# Altium PCB Atmega2560.PcbDoc
Units mm, origin at the board's own origin, x right, y up, seen from the top; angles counter-clockwise.
Board outline 123.1 x 125.77 mm, 2 copper layers (Top Layer, Bottom Layer); 16 components, 92 nets, 362 pads, 0 vias.
Unrouted connection lines stored in the file: 125.
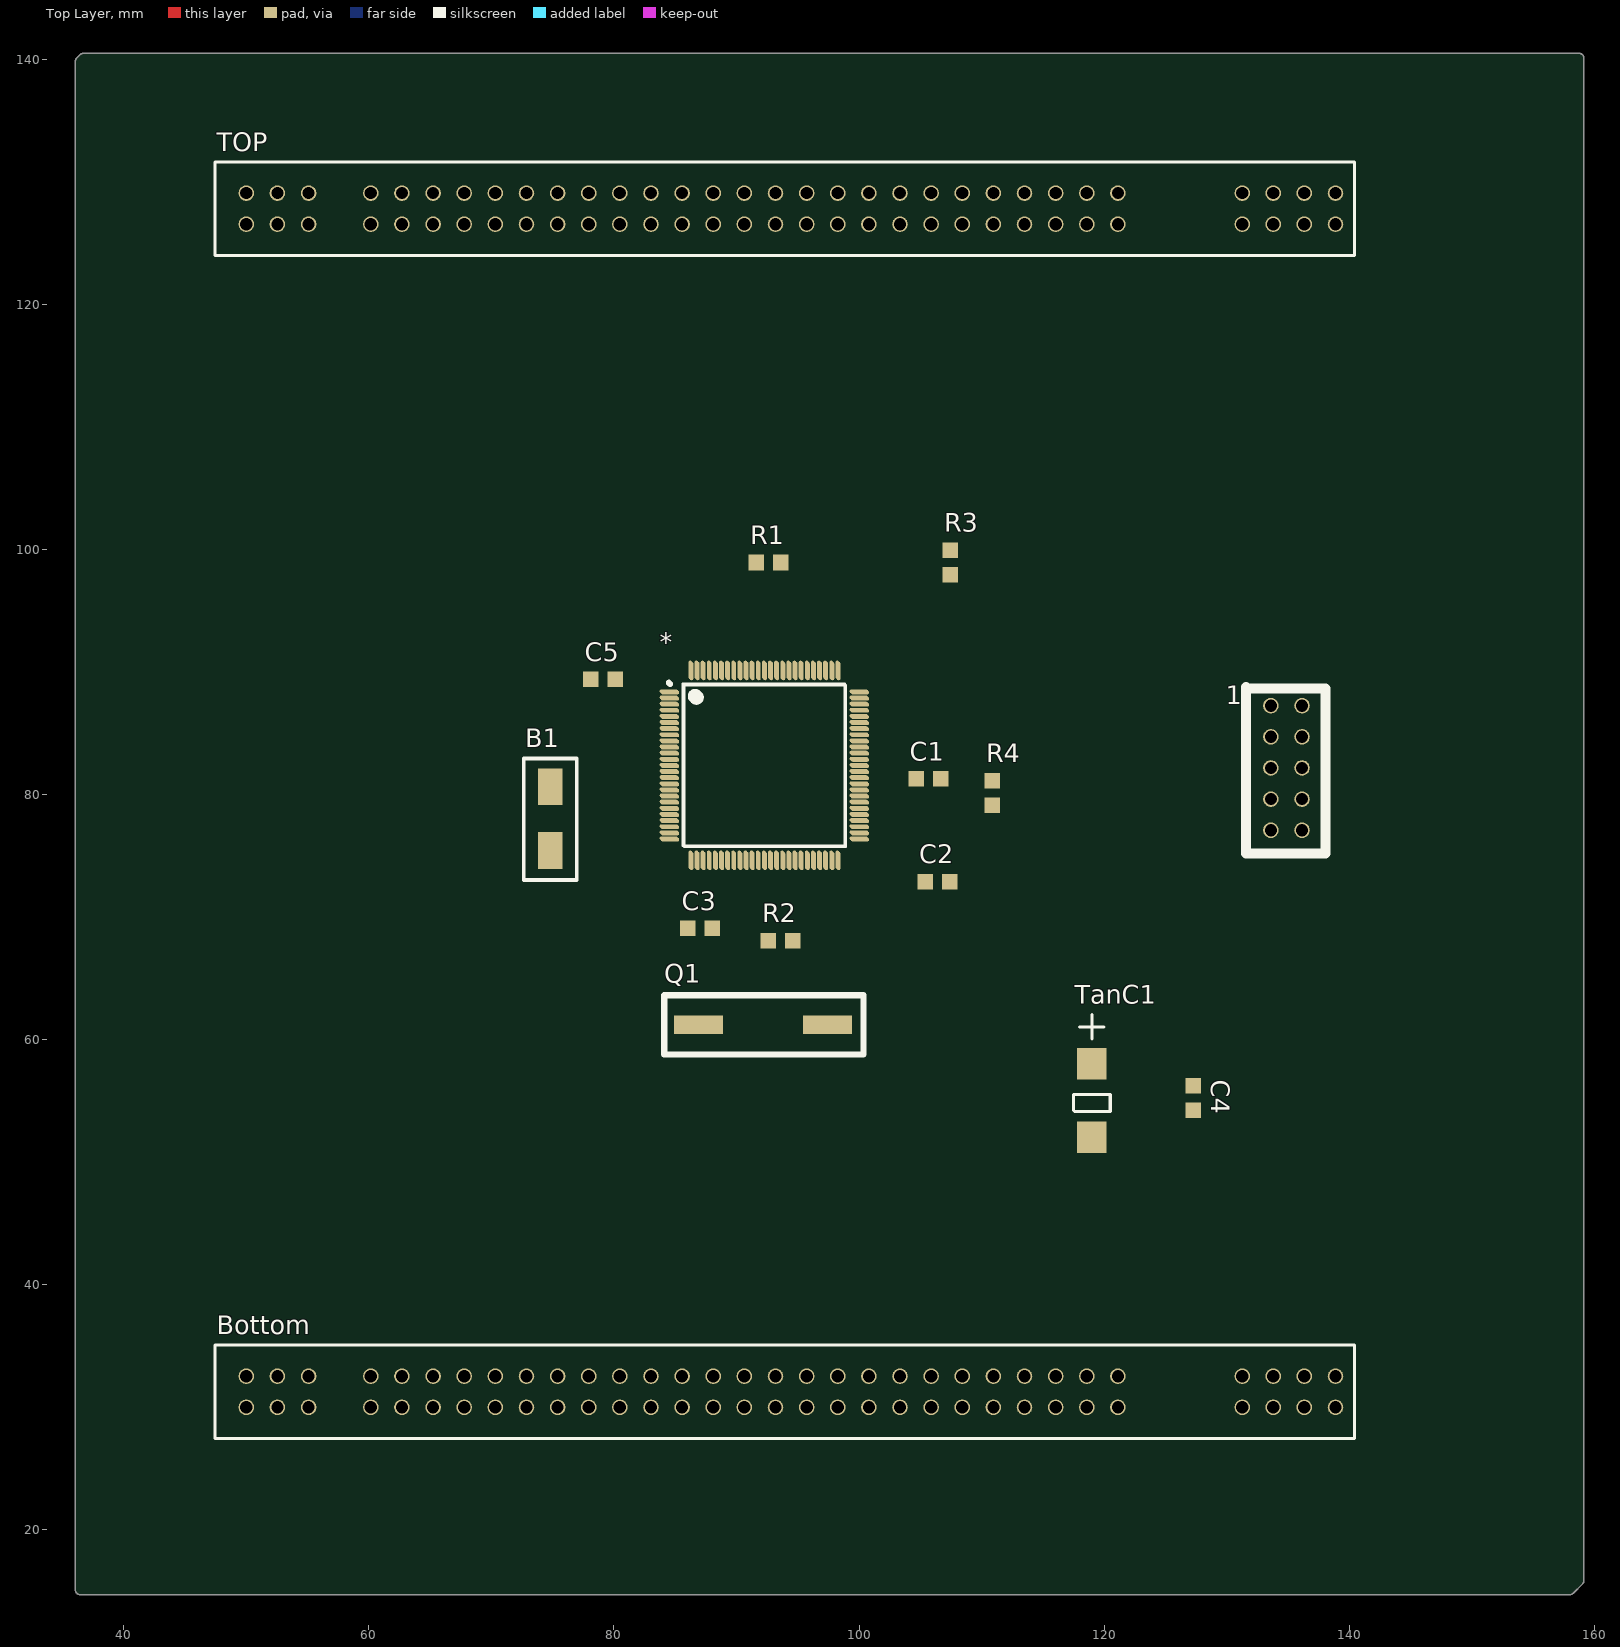
[diagram p0: Top Layer view]
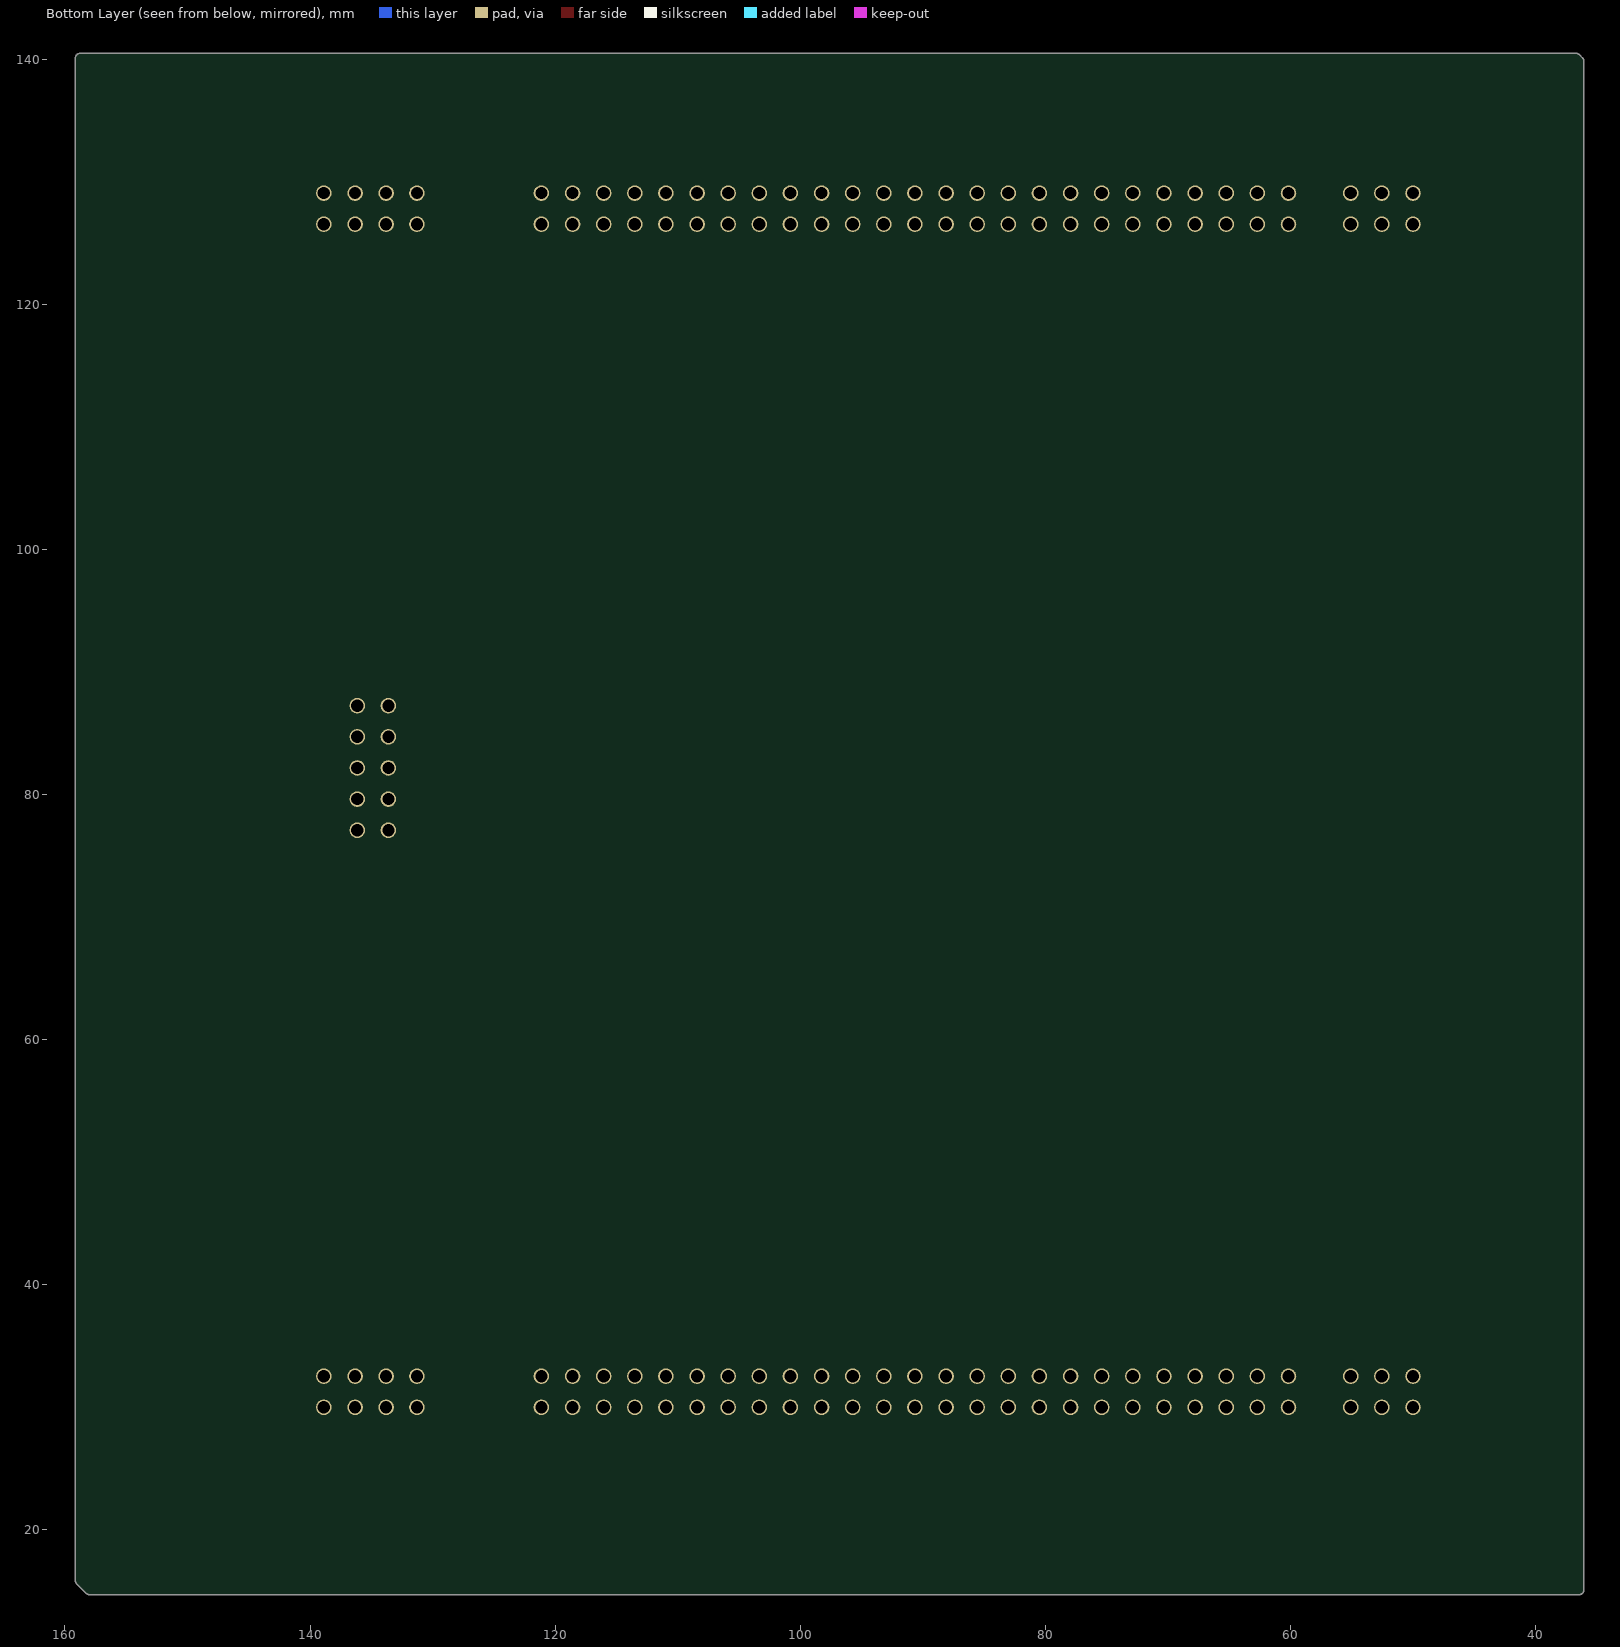
[diagram p1: Bottom Layer view, seen from below]

## Layer stack, top to bottom
Top Solder: solder mask 0.0102, Solder Resist, Dk 3.5
Top Layer: signal copper 0.0356
Dielectric 1: dielectric 0.32, FR-4, Dk 4.8
Bottom Layer: signal copper 0.0356
Bottom Solder: solder mask 0.0102, Solder Resist, Dk 3.5

## Board outline
36.049,15.113 36.049,139.827 cw(c36.449,139.827) 36.166,140.111 36.166,140.11 36.42,140.364 36.419,140.364 cw(c36.703,140.081) 36.703,140.481 158.75,140.481 cw(c158.75,140.081) 159.15,140.081 159.15,15.875 cw(c158.75,15.875) 159.033,15.591 159.033,15.592 158.271,14.83 158.272,14.83 cw(c157.988,15.113) 157.988,14.713 36.449,14.713 cw(c36.449,15.113)

## Design rules (kind name [scope] priority, off if disabled: settings)
Clearance [All] p1: gap=0.254
PolygonConnect [All] p1: connectstyle=Relief reliefconductorwidth=0.254 reliefentries=4 polygonreliefangle="90 Angle" airgapwidth=0.254
RoutingVias [All] p1: holewidth=0.711 width=1.27 viastyle="Through Hole" minholewidth=0.711 minwidth=1.27 maxholewidth=0.711 maxwidth=1.27
SolderMaskExpansion [All] p1: expansion=0.102
Width [All] p1: maxlimit=0.254 minlimit=0.254 preferedwidth=0.254
30 further rules are at their usual default settings.

## Components (designator, comment, footprint, x,y, rotation, side; value= is the part's Value field where it differs from the comment)
1 "JTAG" JTAG 136.144,77.089 r90 top
* "Atmega 2560" "ATMEGA 2560" 108.701,95.38 r0 top
B1 "DTSM 32" "DTSM 32" 74.803,75.445 r90 top
Bottom "CONNECTOR_BOTTOM" Connector 50,30 r0 top
C1 "CAPACITY" R0805 104.648,81.28 r0 top
C2 "CAPACITY" R0805 105.41,72.898 r0 top
C3 "CAPACITY" R0805 86.011,69.088 r0 top
C4 "CAPACITY" R0805 127.254,56.229 r270 top
C5 "CAPACITY" R0805 78.105,89.408 r0 top
Q1 "hc-49 sm" hc-49sm 84.741,63.624 r0 top
R1 "R0805" R0805 91.599,98.933 r0 top
R2 "R0805" R0805 94.583,68.072 r180 top
R3 "R0805" R0805 107.442,99.949 r270 top
R4 "R0805" R0805 110.871,79.121 r90 top
TanC1 "0.1 мкФ" "tantal cap" 118.999,52.039 r0 top
TOP "CONNECTOR_TOP" Connector 50,126.54 r0 top

## Footprints (in the part's own frame and the unit in brackets; to place one, negate y for a bottom-side part, rotate by r counter-clockwise, add the part's x,y. Pads: shape width x height; smd on the part's side, far side on the other; paste and mask are expansions set on the pad)
"ATMEGA 2560" [mm]
  oval 1.5x0.3 smd: 1(-24.225,-6.954) 1(-24.125,-7.054) 2(-24.225,-7.454) 2(-24.125,-7.554) 3(-24.225,-7.954) 3(-24.125,-8.054) 4(-24.225,-8.454) 4(-24.125,-8.554) 5(-24.225,-8.954) 5(-24.125,-9.054) 6(-24.225,-9.454) 6(-24.125,-9.554) 7(-24.225,-9.954) 7(-24.125,-10.054) 8(-24.225,-10.454) 8(-24.125,-10.554) 9(-24.225,-10.954) 9(-24.125,-11.054) 10(-24.225,-11.454) 10(-24.125,-11.554) 11(-24.225,-11.954) 11(-24.125,-12.054) 12(-24.225,-12.454) 12(-24.125,-12.554) 13(-24.225,-12.954) 13(-24.125,-13.054) 14(-24.225,-13.454) 14(-24.125,-13.554) 15(-24.225,-13.954) 15(-24.125,-14.054) 16(-24.225,-14.454) 16(-24.125,-14.554) 17(-24.225,-14.954) 17(-24.125,-15.054) 18(-24.225,-15.454) 18(-24.125,-15.554) 19(-24.225,-15.954) 19(-24.125,-16.054) 20(-24.225,-16.454) 20(-24.125,-16.554) 21(-24.225,-16.954) 21(-24.125,-17.054) 22(-24.225,-17.454) 22(-24.125,-17.554) 23(-24.225,-17.954) 23(-24.125,-18.054) 24(-24.225,-18.454) 24(-24.125,-18.554) 25(-24.225,-18.954) 25(-24.125,-19.054) 51(-8.725,-18.954) 51(-8.625,-19.054) 52(-8.725,-18.454) 52(-8.625,-18.554) 53(-8.725,-17.954) 53(-8.625,-18.054) 54(-8.725,-17.454) 54(-8.625,-17.554) 55(-8.725,-16.954) 55(-8.625,-17.054) 56(-8.725,-16.454) 56(-8.625,-16.554) 57(-8.725,-15.954) 57(-8.625,-16.054) 58(-8.725,-15.454) 58(-8.625,-15.554) 59(-8.725,-14.954) 59(-8.625,-15.054) 60(-8.725,-14.454) 60(-8.625,-14.554) 61(-8.725,-13.954) 61(-8.625,-14.054) 62(-8.725,-13.454) 62(-8.625,-13.554) 63(-8.725,-12.954) 63(-8.625,-13.054) 64(-8.725,-12.454) 64(-8.625,-12.554) 65(-8.725,-11.954) 65(-8.625,-12.054) 66(-8.725,-11.454) 66(-8.625,-11.554) 67(-8.725,-10.954) 67(-8.625,-11.054) 68(-8.725,-10.454) 68(-8.625,-10.554) 69(-8.725,-9.954) 69(-8.625,-10.054) 70(-8.725,-9.454) 70(-8.625,-9.554) 71(-8.725,-8.954) 71(-8.625,-9.054) 72(-8.725,-8.454) 72(-8.625,-8.554) 73(-8.725,-7.954) 73(-8.625,-8.054) 74(-8.725,-7.454) 74(-8.625,-7.554) 75(-8.725,-6.954) 75(-8.625,-7.054)
  oval 0.3x1.5 smd: 26(-22.475,-20.704) 26(-22.375,-20.804) 27(-21.975,-20.704) 27(-21.875,-20.804) 28(-21.475,-20.704) 28(-21.375,-20.804) 29(-20.975,-20.704) 29(-20.875,-20.804) 30(-20.475,-20.704) 30(-20.375,-20.804) 31(-19.975,-20.704) 31(-19.875,-20.804) 32(-19.475,-20.704) 32(-19.375,-20.804) 33(-18.975,-20.704) 33(-18.875,-20.804) 34(-18.475,-20.704) 34(-18.375,-20.804) 35(-17.975,-20.704) 35(-17.875,-20.804) 36(-17.475,-20.704) 36(-17.375,-20.804) 37(-16.975,-20.704) 37(-16.875,-20.804) 38(-16.475,-20.704) 38(-16.375,-20.804) 39(-15.975,-20.704) 39(-15.875,-20.804) 40(-15.475,-20.704) 40(-15.375,-20.804) 41(-14.975,-20.704) 41(-14.875,-20.804) 42(-14.475,-20.704) 42(-14.375,-20.804) 43(-13.975,-20.704) 43(-13.875,-20.804) 44(-13.475,-20.704) 44(-13.375,-20.804) 45(-12.975,-20.704) 45(-12.875,-20.804) 46(-12.475,-20.704) 46(-12.375,-20.804) 47(-11.975,-20.704) 47(-11.875,-20.804) 48(-11.475,-20.704) 48(-11.375,-20.804) 49(-10.975,-20.704) 49(-10.875,-20.804) 50(-10.475,-20.704) 50(-10.375,-20.804) 76(-10.475,-5.204) 76(-10.375,-5.304) 77(-10.975,-5.204) 77(-10.875,-5.304) 78(-11.475,-5.204) 78(-11.375,-5.304) 79(-11.975,-5.204) 79(-11.875,-5.304) 80(-12.475,-5.204) 80(-12.375,-5.304) 81(-12.975,-5.204) 81(-12.875,-5.304) 82(-13.475,-5.204) 82(-13.375,-5.304) 83(-13.975,-5.204) 83(-13.875,-5.304) 84(-14.475,-5.204) 84(-14.375,-5.304) 85(-14.975,-5.204) 85(-14.875,-5.304) 86(-15.475,-5.204) 86(-15.375,-5.304) 87(-15.975,-5.204) 87(-15.875,-5.304) 88(-16.475,-5.204) 88(-16.375,-5.304) 89(-16.975,-5.204) 89(-16.875,-5.304) 90(-17.475,-5.204) 90(-17.375,-5.304) 91(-17.975,-5.204) 91(-17.875,-5.304) 92(-18.475,-5.204) 92(-18.375,-5.304) 93(-18.975,-5.204) 93(-18.875,-5.304) 94(-19.475,-5.204) 94(-19.375,-5.304) 95(-19.975,-5.204) 95(-19.875,-5.304) 96(-20.475,-5.204) 96(-20.375,-5.304) 97(-20.975,-5.204) 97(-20.875,-5.304) 98(-21.475,-5.204) 98(-21.375,-5.304) 99(-21.975,-5.204) 99(-21.875,-5.304) 100(-22.475,-5.204) 100(-22.375,-5.304)
  silkscreen extent -24.35,-19.65 -9.77,-6.13, body extent -23.47,-20.05 -9.37,-5.95, height 1.2
Connector [mm] "MCU/FPGA board connector"
  round 1.27 / inner round 0.8 / far side round 1.27 hole 1: 0(0,2.54) 1(2.54,2.54) 2(5.08,2.54) 3(10.16,2.54) 4(12.7,2.54) 5(15.24,2.54) 6(17.78,2.54) 7(20.32,2.54) 8(22.86,2.54) 9(25.4,2.54) 10(27.94,2.54) 11(30.48,2.54) 12(33.02,2.54) 13(35.56,2.54) 14(38.1,2.54) 15(40.64,2.54) 16(43.18,2.54) 17(45.72,2.54) 18(48.26,2.54) 19(50.8,2.54) 20(53.34,2.54) 21(55.88,2.54) 22(58.42,2.54) 23(60.96,2.54) 24(63.5,2.54) 25(66.04,2.54) 26(68.58,2.54) 27(71.12,2.54) 28(81.275,2.54) 29(83.795,2.54) 30(86.325,2.54) 31(88.875,2.54) 32(88.875,0) 33(86.325,0) 34(83.795,0) 35(81.275,0) 36(71.12,0) 37(68.58,0) 38(66.04,0) 39(63.5,0) 40(60.96,0) 41(58.42,0) 42(55.88,0) 43(53.34,0) 44(50.8,0) 45(48.26,0) 46(45.72,0) 47(43.18,0) 48(40.64,0) 49(38.1,0) 50(35.56,0) 51(33.02,0) 52(30.48,0) 53(27.94,0) 54(25.4,0) 55(22.86,0) 56(20.32,0) 57(17.78,0) 58(15.24,0) 59(12.7,0) 60(10.16,0) 61(5.08,0) 62(2.54,0) 63(0,0)
  silkscreen extent -2.54,-2.54 90.43,5.08
"DTSM 32" [mm]
  rect 3x2 smd: 1(0,0) 2(5.2,0)
  silkscreen extent -2.41,-2.16 7.49,2.16
hc-49sm [mm]
  rect 4x1.5 smd: 1(2.159,-2.41) 2(12.668,-2.41)
  silkscreen extent -0.64,-4.83 15.62,0
JTAG [mm]
  round 1.27 / inner round 0.8 / far side round 1.27 hole 1: 1(0,0) 2(0,2.54) 3(2.54,0) 4(2.54,2.54) 5(5.08,0) 6(5.08,2.54) 7(7.62,0) 8(7.62,2.54) 9(10.16,0) 10(10.16,2.54)
  silkscreen extent -1.91,-1.91 11.68,4.57
R0805 [mm]
  rect 1.27x1.27 smd: 1(0,0) 2(2,0)
"tantal cap" [mm]
  rect 2.4x2.6 smd mask+0.05: 0(0,0) 1(0,6)
  silkscreen extent -1.5,2.1 1.5,10

## Part data
Bottom TOP: "control board connector"
TanC1: library part "TECAP, 100 мкФ"

## Nets (pads, with @x,y where several pads share a name; then routed paths per layer and width w, separated by ;. In a path a pad name is that pad's centre, name@x,y a point inside that pad or via, vN(x,y) a via of type N, cw(c..) or ccw(c..) an arc to the next point about the centre after c; other vN are vias at no path point)
"ADC 0": *.97 TOP.32
"ADC 1": *.96 TOP.33
"ADC 2": *.95 TOP.34
"ADC 3": *.94 TOP.35
"ADC 4": *.89 Bottom.31
"ADC 5": *.88 Bottom.30
"ADC 6": *.87 Bottom.29
"ADC 7": *.86 Bottom.28
AREF: *.98 *.100 R1.1
"GND PRO": 1.3 1.5 1.9 *.11 *.32 *.62 *.81 *.99 B1.2 C1.1 C2.1 C3.1 C4.2 C5.1 TanC1.0 TOP.0
Net*_33: *.33 Q1.1
Net*_34: *.34 Q1.2
"PA 0": *.78 TOP.45
"PA 1": *.77 TOP.44
"PA 2": *.76 TOP.43
"PA 3": *.75 TOP.42
"PA 4": *.74 TOP.41
"PA 5": *.73 TOP.40
"PA 6": *.72 TOP.39
"PA 7": *.71 TOP.38
"PB 4": *.23 Bottom.3
"PB 5": *.24 Bottom.4
"PB 6": *.25 Bottom.5
"PB 7": *.26 Bottom.6
"PC 0": *.53 Bottom.60
"PC 1": *.54 Bottom.59
"PC 2": *.55 Bottom.58
"PC 3": *.56 Bottom.57
"PC 4": *.57 Bottom.56
"PC 5": *.58 Bottom.55
"PC 6": *.59 Bottom.54
"PC 7": *.60 Bottom.53
"PD 4": *.47 Bottom.22
"PD 5": *.48 Bottom.25
"PD 6": *.49 Bottom.23
"PD 7": *.50 Bottom.24
"PE 0": *.2 TOP.53
"PE 1": *.3 TOP.54
"PE 2": *.4 TOP.55
"PE 3": *.5 TOP.56
"PE 4": *.6 TOP.57
"PE 5": *.7 TOP.58
"PE 6": *.8 TOP.59
"PE 7": *.9 TOP.60
"PF 4": 1.4 *.93
"PF 5": 1.2 *.92
"PF 6": 1.6 *.91
"PF 7": 1.8 *.90
"PG 2": *.70 TOP.37
"PG 3": *.29 Bottom.8
"PG 4": *.28 Bottom.9
"PG 5": *.1 Bottom.38
"PH 0": *.12 Bottom.10
"PH 1": *.13 Bottom.11
"PH 2": *.14 Bottom.12
"PH 3": *.15 Bottom.13
"PH 4": *.16 Bottom.14
"PH 5": *.17 Bottom.15
"PH 6": *.18 Bottom.16
"PH 7": *.27 Bottom.7
"PJ 0": *.63 Bottom.41
"PJ 1": *.64 Bottom.40
"PJ 2": *.65 Bottom.39
"PJ 3": *.66 TOP.22
"PJ 4": *.67 TOP.21
"PJ 5": *.68 TOP.20
"PJ 6": *.69 TOP.19
"PJ 7": *.79 TOP.46
"PK 4": *.85 TOP.50
"PK 5": *.84 TOP.49
"PK 6": *.83 TOP.48
"PK 7": *.82 TOP.47
"PL 0": *.35 Bottom.52
"PL 1": *.36 Bottom.51
"PL 2": *.37 Bottom.50
"PL 3": *.38 Bottom.49
"PL 4": *.39 Bottom.48
"PL 5": *.40 Bottom.47
"PL 6": *.41 Bottom.46
"PL 7": *.42 Bottom.45
R\D\: *.52 Bottom.36
R\E\S\E\T\: 1.10 *.30 B1.1 R4.1
RX: *.45 Bottom.26
SCL: *.43 R3.2 TOP.36
SDA: *.44 R2.1 TOP.27
"SPI 1": *.19 TOP.26
"SPI 2": *.20 TOP.25
"SPI 3": *.21 TOP.24
"SPI 4": *.22 TOP.23
TX: *.46 Bottom.27
"VCC PRO": 1.1 *.10 *.31 *.61 *.80 C1.2 C2.2 C3.2 C4.1 C5.2 R1.2 R2.2 R3.1 R4.2 TanC1.1 TOP.62
W\R\: *.51 Bottom.37
pads on no net: 1.7 Bottom.0 Bottom.1 Bottom.2 Bottom.17 Bottom.18 Bottom.19 Bottom.20 Bottom.21 Bottom.32 Bottom.33 Bottom.34 Bottom.35 Bottom.42 Bottom.43 Bottom.44 Bottom.61 Bottom.62 Bottom.63 TOP.1 TOP.2 TOP.3 TOP.4 TOP.5 TOP.6 TOP.7 TOP.8 TOP.9 TOP.10 TOP.11 TOP.12 TOP.13 TOP.14 TOP.15 TOP.16 TOP.17 TOP.18 TOP.28 TOP.29 TOP.30 TOP.31 TOP.51 TOP.52 TOP.61 TOP.63

## Silkscreen, mask and mechanical layers (free items; w line width, h text height)
Mechanical 1:
  lines w0.8: 36.449,25.908 36.449,139.827 36.703,140.081 158.75,140.081 158.75,15.875 157.988,15.113 36.449,15.113 36.449,26.162